# Altium PCB Insole_ver2.PcbDoc (part 1 of 3)
Units mil, origin at the board's own origin, x right, y up, seen from the top; angles counter-clockwise.
Board outline 8634.93 x 10258.5 mil, 2 copper layers (Top Layer, Bottom Layer); 507 components, 50 nets, 1329 pads, 253 vias.
Unrouted connection lines stored in the file: 728.
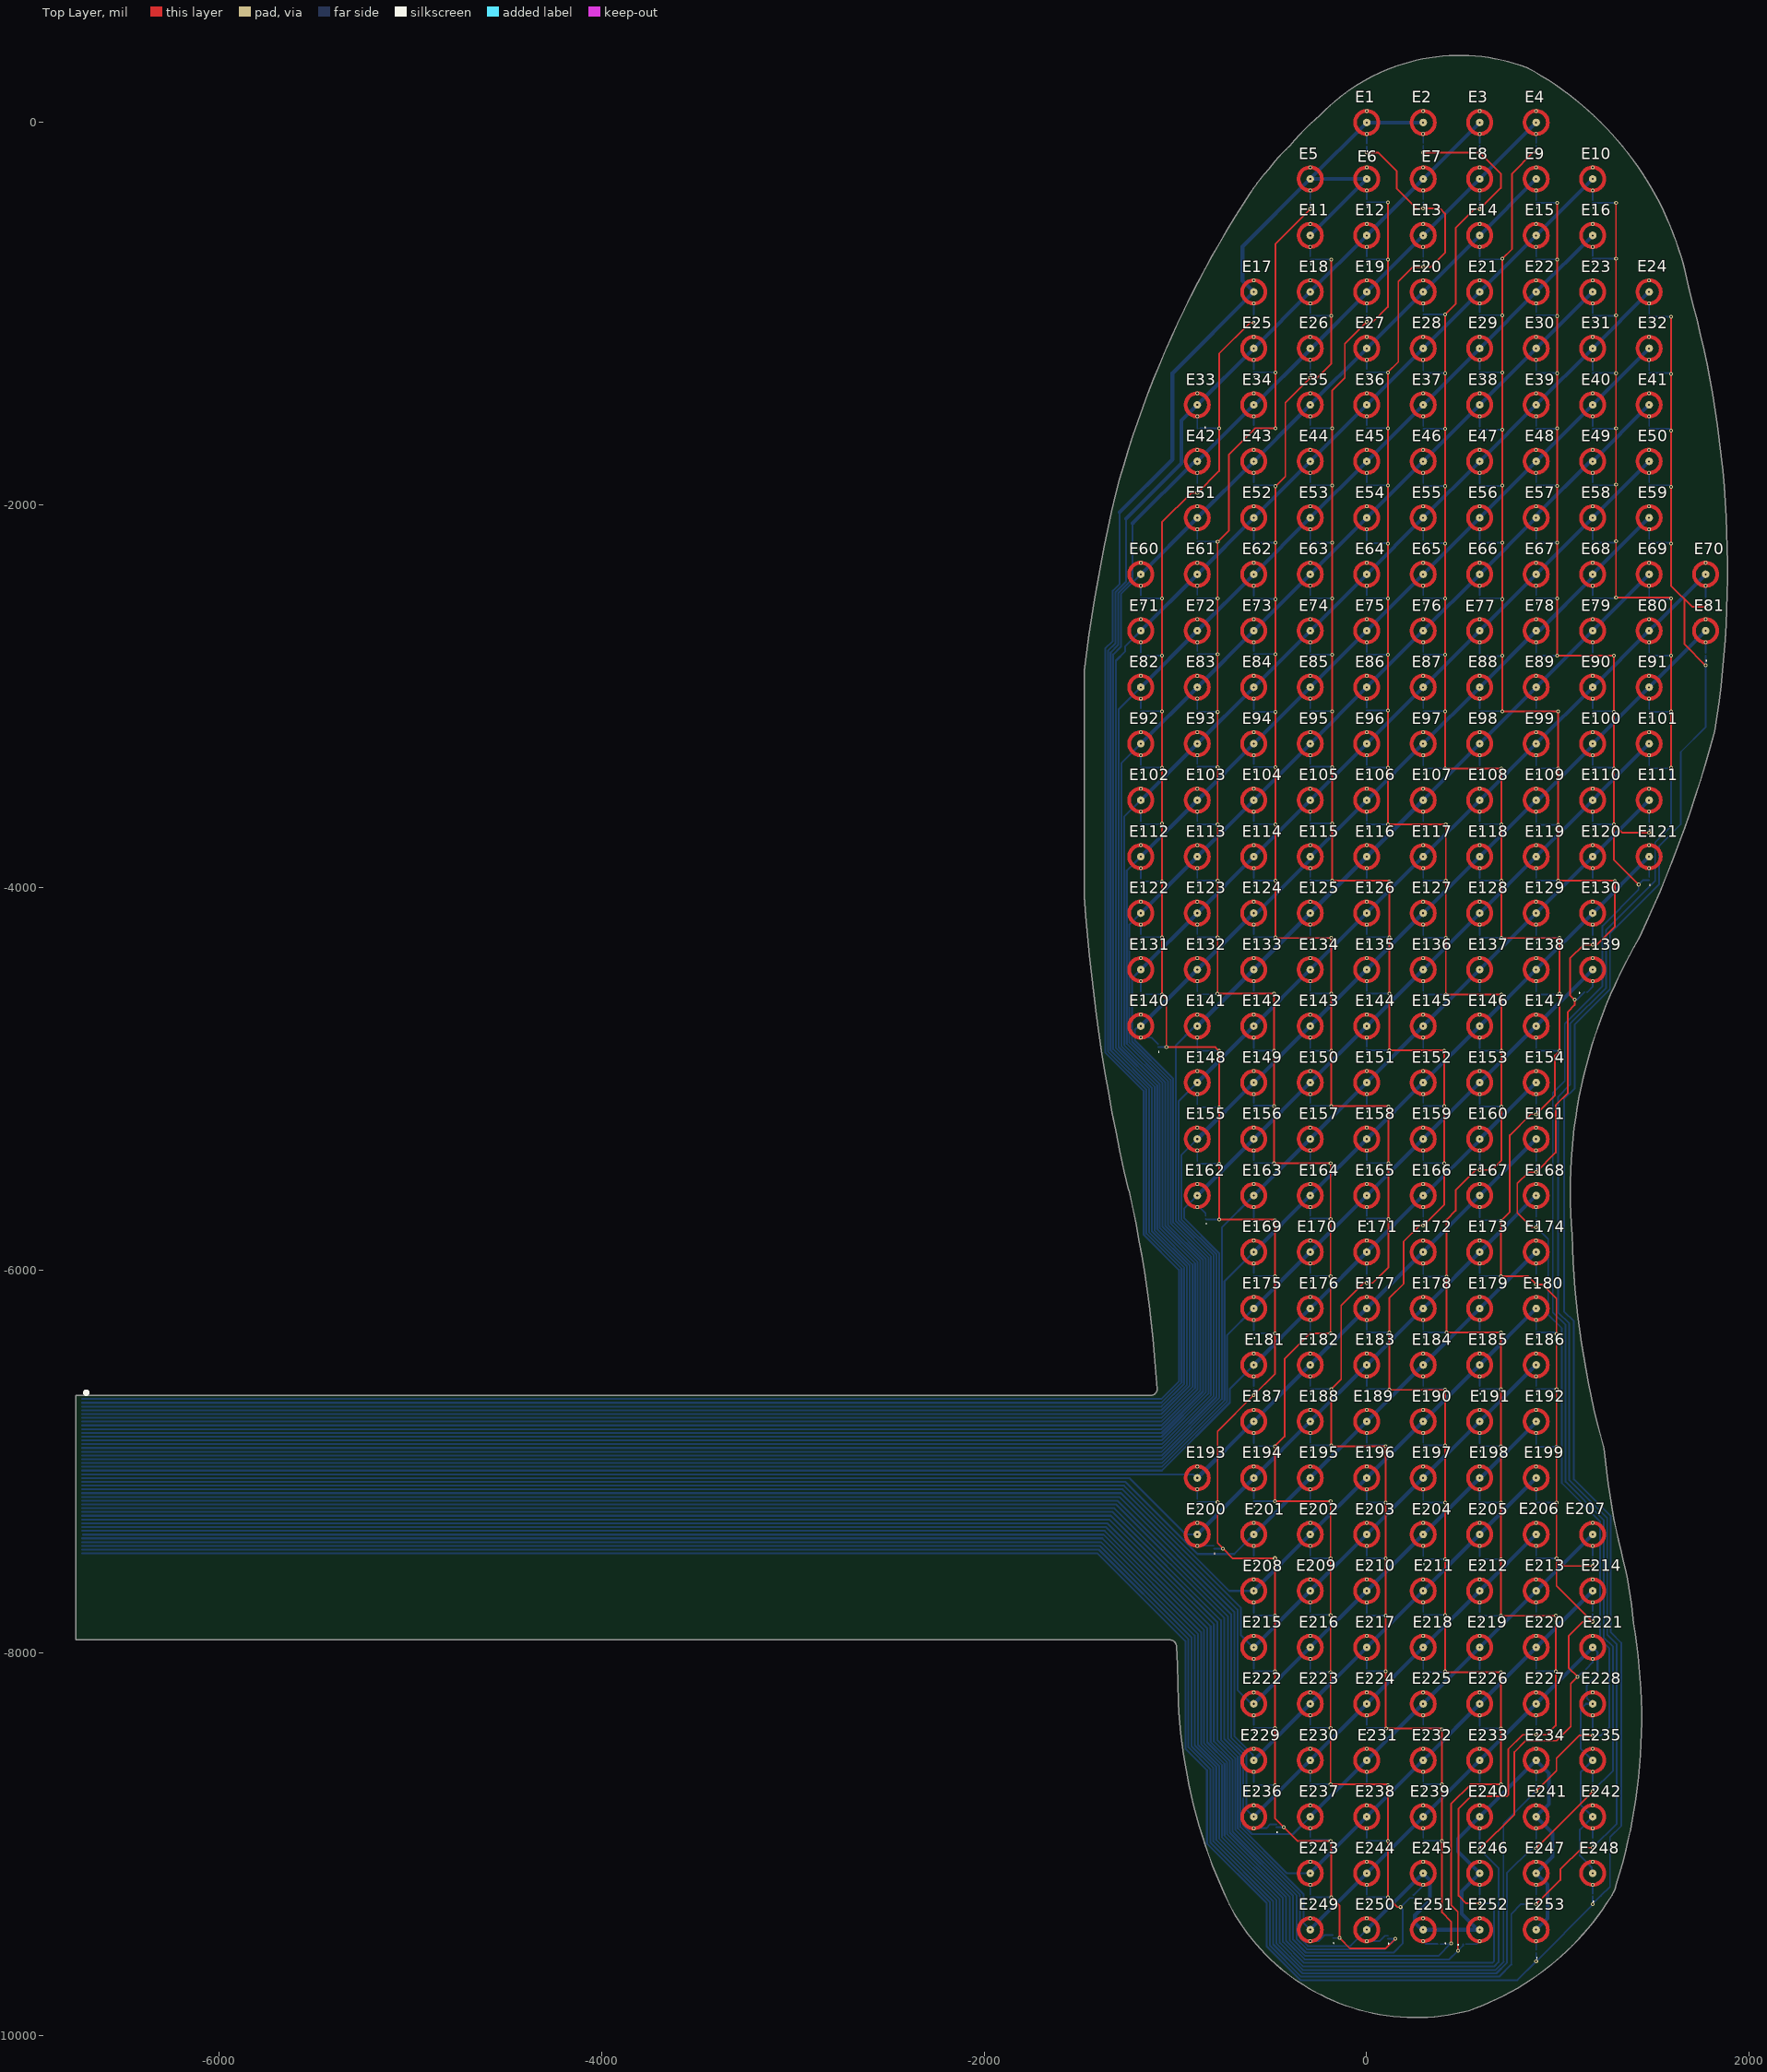
[diagram p0: Top Layer view]
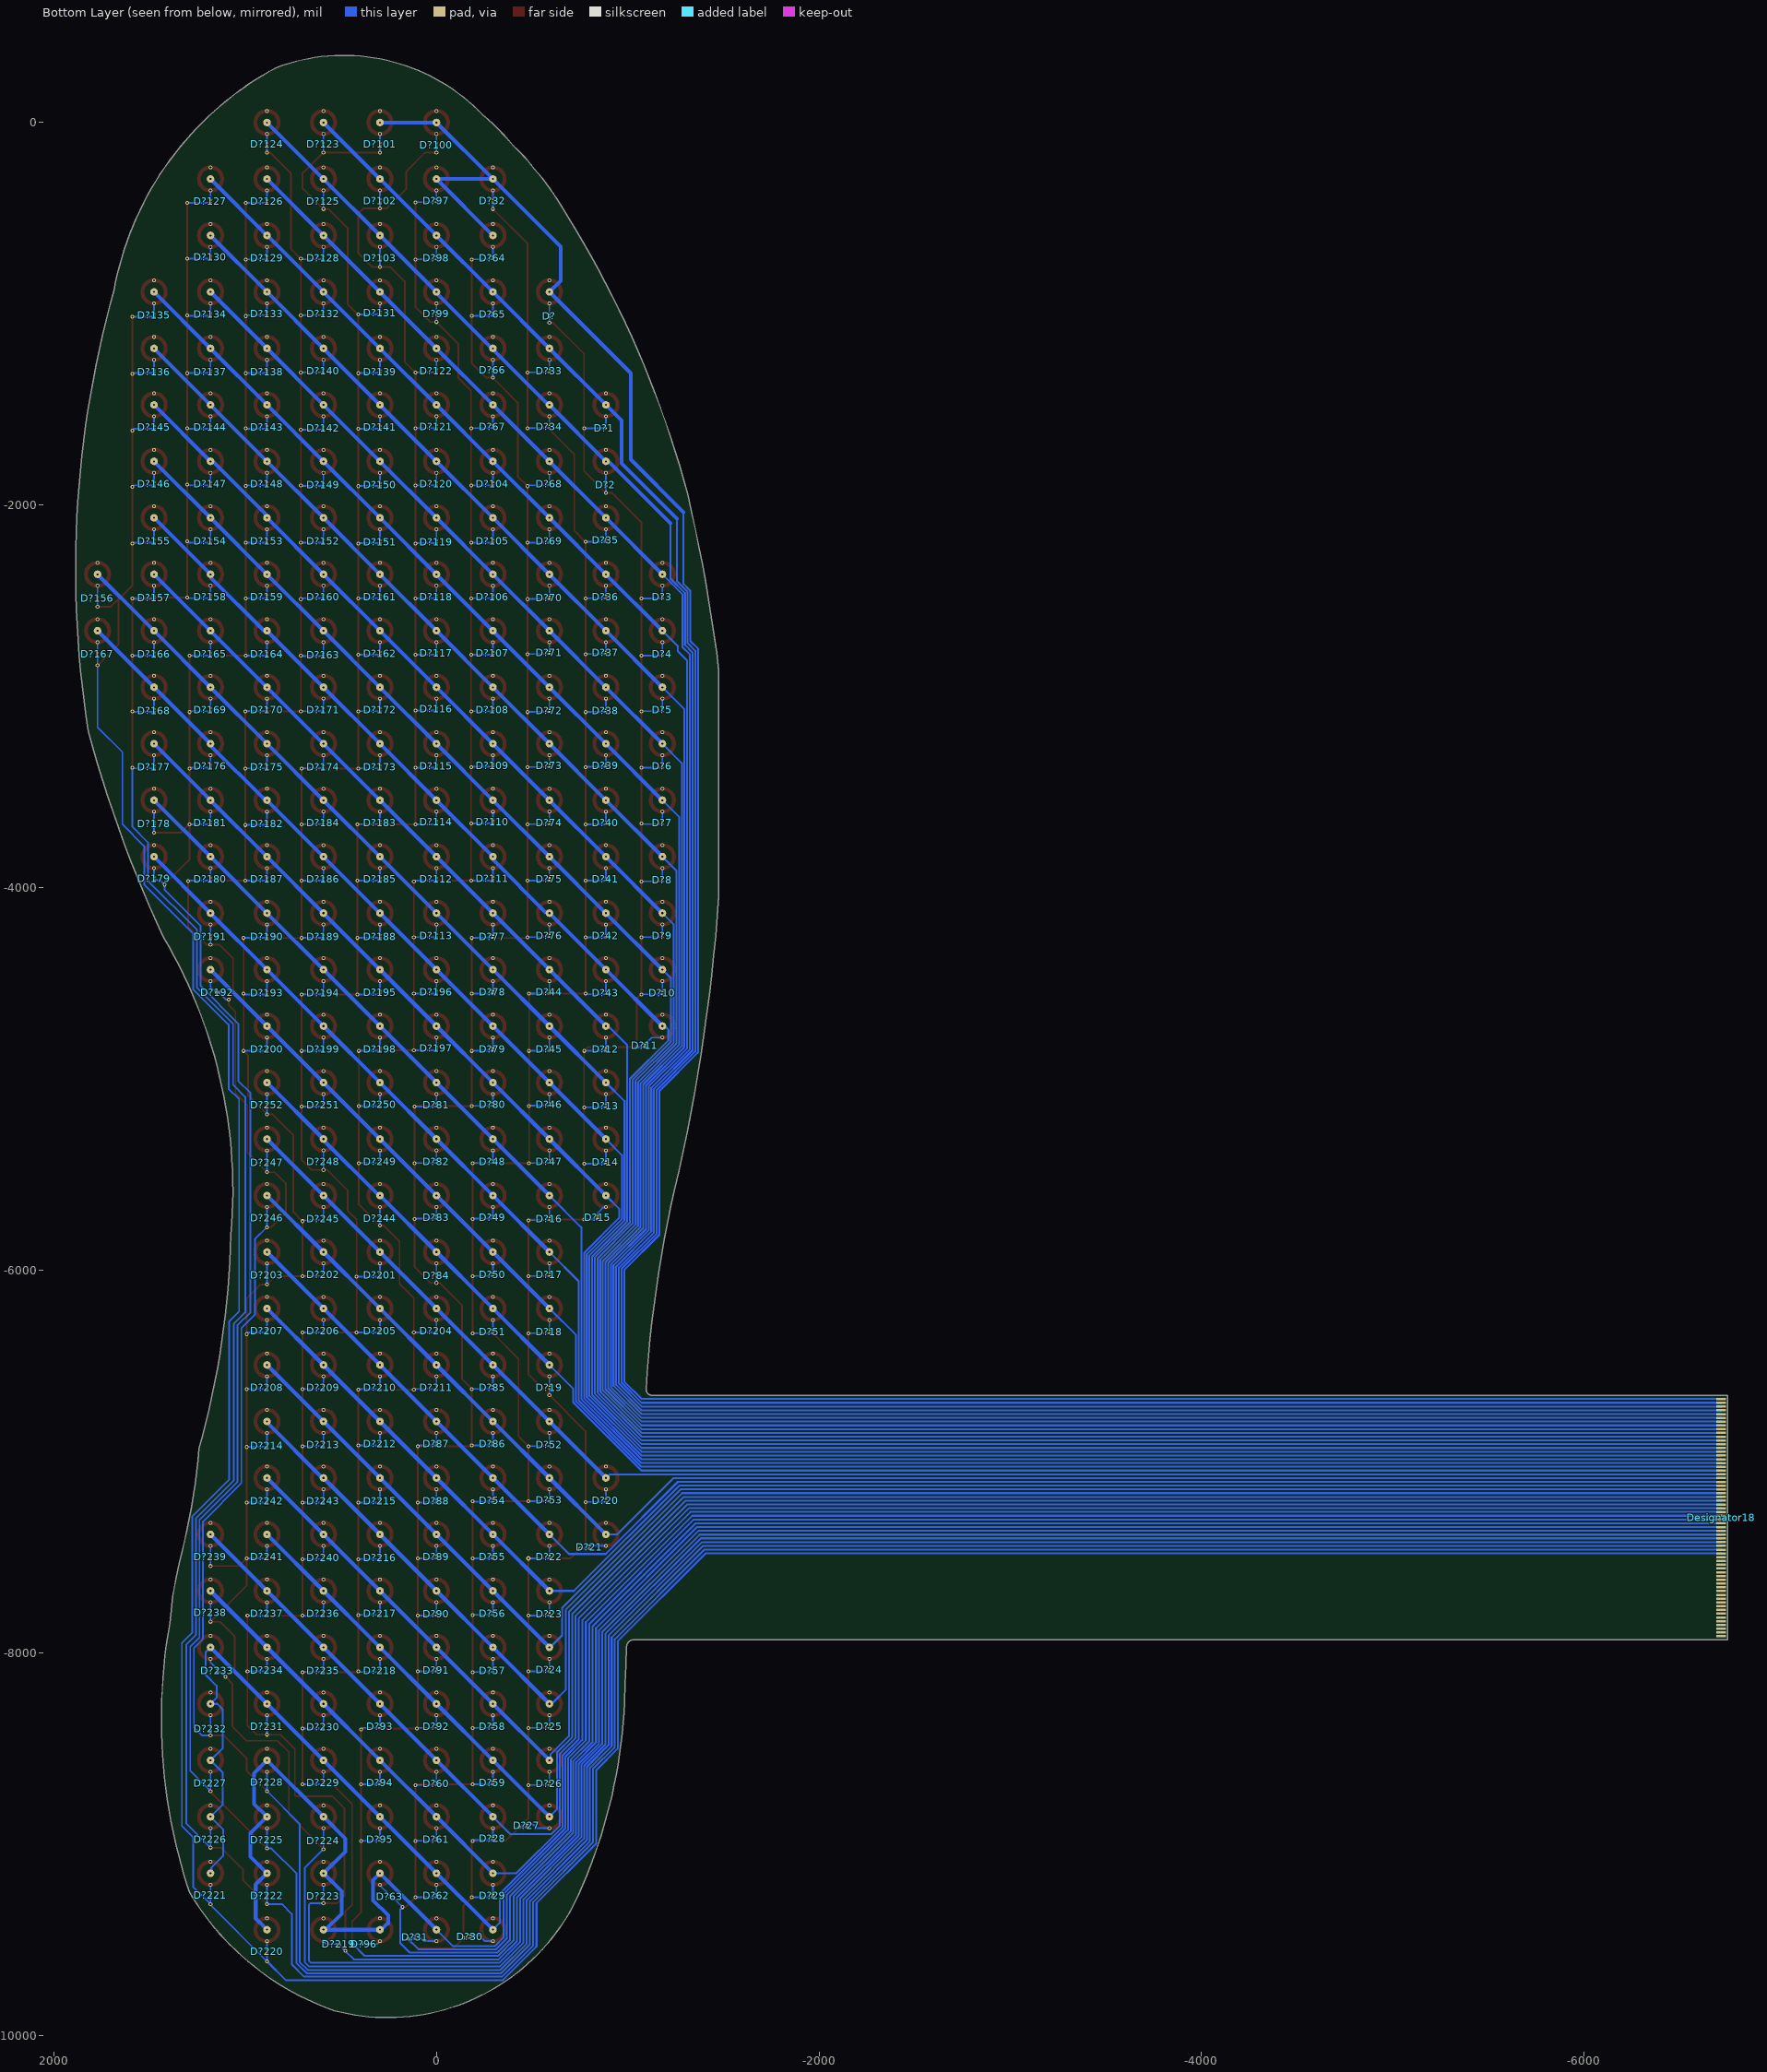
[diagram p1: Bottom Layer view, seen from below]

## Layer stack, top to bottom
Top Solder: solder mask 0.4, Solder Resist, Dk 3.5
Top Layer: signal copper 1.4
Dielectric 1: dielectric 12.6, FR-4, Dk 4.8
Bottom Layer: signal copper 1.4
Bottom Solder: solder mask 0.4, Solder Resist, Dk 3.5

## Board outline
-6749.02,-7933.46 -6749.02,-7924.29 -6749.02,-6664.33 -6749.02,-6654.33 -1125,-6654.33 ccw(c-1126.66,-6623.66) -1096,-6622 -1095.9,-6621.99 ccw(c-7729.36,-7029.93) -1243,-5582.02 -1244.89,-5582.15 cw(c8166.3,-3378.54) -1476.36,-4045.95 -1476.36,-2864.85 cw(c7311.45,-3944.72) -1313.08,-1942.41 cw(c3918.94,-3341.98) -645.19,-426.24 cw(c298.66,-974.06) -512.56,-244.08 cw(c175.46,-757.6) -401.59,-121.92 cw(c543.88,-896.94) -242,39.53 cw(c485.96,-656.21) 835.98,287.96 cw(c52.22,-1175.58) 1685.24,-876.42 cw(c-3527.57,-2337.08) 1819.32,-3184.24 cw(c-4531.03,-1475.13) 1426.2,-4260.7 ccw(c3666.75,-5584.92) 1074.31,-5814.86 ccw(c5587.75,-5713.61) 1240.88,-6932.71 ccw(c4856.2,-6611.73) 1331.49,-7477.73 cw(c-856.54,-8039.02) 1394.08,-7846.04 cw(c-1473.16,-8345.15) 1304.04,-9215.4 1303.8,-9215.35 cw(c1118,-9169.77) 1274.97,-9279.14 cw(c65,-8526.05) 531.52,-9872.72 cw(c255.92,-8809.73) -718.36,-9316.36 cw(c1754.38,-8132.87) -984.15,-8257.65 ccw(c-12790.3,-8516.48) -994.08,-7967.56 ccw(c-1029.84,-7969.22) -1031.5,-7933.46

## Design rules (kind name [scope] priority, off if disabled: settings)
Clearance [All] p1: gap=10 ignorepadtopadclearanceinfootprint=TRUE except(0: Arc-SMDPad Arc-THPad Arc-Hole Track-Hole SMDPad-Hole THPad-Hole Via-Hole Fill-Hole Poly-Hole Region-Hole Text-Hole; 4: Arc-Arc Arc-Track Track-Track Track-THPad; 5: SMDPad-SMDPad SMDPad-THPad SMDPad-Fill SMDPad-Poly SMDPad-Region THPad-Fill THPad-Poly THPad-Region; 5.91: Track-SMDPad; 7.87: Arc-Fill Arc-Poly Arc-Region Track-Fill Track-Poly Track-Region)
DiffPairsRouting [All] p1: maxlimit=10 minlimit=10 mostfreqgap=10 toplayer_minwidth=15 toplayer_maxwidth=15 toplayer_prefwidth=15 bottomlayer_minwidth=15 bottomlayer_maxwidth=15 bottomlayer_prefwidth=15 substack1={6D9DD50E-99D7-4FCE-B177-F3C0DD92A880} toplayer_{6d9dd50e-99d7-4fce-b177-f3c0dd92a880}_minwidth=15 toplayer_{6d9dd50e-99d7-4fce-b177-f3c0dd92a880}_maxwidth=15 toplayer_{6d9dd50e-99d7-4fce-b177-f3c0dd92a880}_prefwidth=15 bottomlayer_{6d9dd50e-99d7-4fce-b177-f3c0dd92a880}_minwidth=15 bottomlayer_{6d9dd50e-99d7-4fce-b177-f3c0dd92a880}_maxwidth=15 bottomlayer_{6d9dd50e-99d7-4fce-b177-f3c0dd92a880}_prefwidth=15 maxuncoupledlength=500
PolygonConnect [All] p1: connectstyle=Relief reliefconductorwidth=10 reliefentries=4 polygonreliefangle="90 Angle" airgapwidth=10
RoutingVias [All] p1: holewidth=28 width=50 viastyle="Through Hole" minholewidth=28 minwidth=50 maxholewidth=28 maxwidth=50
ShortCircuit [All] p1: allowed=TRUE
SolderMaskExpansion [All] p1: expansion=4 istentingtop=FALSE
UnRoutedNet [All] p1 off:
Width [All] p1: maxlimit=39.37 minlimit=9 preferedwidth=10 substack1={6D9DD50E-99D7-4FCE-B177-F3C0DD92A880} toplayer_{6d9dd50e-99d7-4fce-b177-f3c0dd92a880}_minwidth=10 toplayer_{6d9dd50e-99d7-4fce-b177-f3c0dd92a880}_maxwidth=10 bottomlayer_{6d9dd50e-99d7-4fce-b177-f3c0dd92a880}_minwidth=10 bottomlayer_{6d9dd50e-99d7-4fce-b177-f3c0dd92a880}_maxwidth=10 minimp=50.000000 maximp=50.000000 favimp=50.000000
27 further rules are at their usual default settings.

## Classes and differential pairs
component class Insole_ver2: D1 E1 E2 E3 E4 E5 E6 E7 E8 E9 E10 E11 E12 E13 E14 E15 E16 E17 E18 E19 E20 E21 E22 E23 E24 E25 E26 E27 E28 E29 E30 E31 E32 E33 E34 E35 E36 E37 E38 E39 E40 E41 E42 E43 E44 E45 E46 E47 E48 E49 E50 E51 E52 E53 E54 E55 E56 E57 E58 E59 E60 E61 E62 E63 E64 E65 E66 E67 E68 E69 E70 E71 E72 E73 E74 E75 E76 E77 E78 E79 E80 E81 E82 E83 E84 E85 E86 E87 E88 E89 E90 E91 E92 E93 E94 E95 E96 E97 E98 E99 E100 E101 E102 E103 E104 E105 E106 E107 E108 E109 E110 E111 E112 E113 E114 E115 E116 E117 E118 E119 E120 E121 E122 E123 E124 E125 E126 E127 E128 E129 E130 E131 E132 E133 E134 E135 E136 E137 E138 E139 E140 E141 E142 E143 E144 E145 E146 E147 E148 E149 E150 E151 E152 E153 E154 E155 E156 E157 E158 E159 E160 E161 E163 E164 E165 E166 E167 E168 E170 E172 E174 E176 E178 E180 E182 E184 E186 E246 E248 E250

## Components (designator, comment, footprint, x,y, rotation, side; value= is the part's Value field where it differs from the comment)
D? "RB520ZS-30T2R" RB520ZS30T2R -590.55,-1011.42 r180 top
D?1 "RB520ZS-30T2R" RB520ZS30T2R -877.56,-1598.43 r270 top (schematic designator D?)
D?2 "RB520ZS-30T2R" RB520ZS30T2R -885.83,-1893.31 r180 top (schematic designator D?)
D?3 "RB520ZS-30T2R" RB520ZS30T2R -1181.1,-2480.71 r180 top (schematic designator D?)
D?4 "RB520ZS-30T2R" RB520ZS30T2R -1181.1,-2779.13 r180 top (schematic designator D?)
D?5 "RB520ZS-30T2R" RB520ZS30T2R -1181.1,-3070.47 r180 top (schematic designator D?)
D?6 "RB520ZS-30T2R" RB520ZS30T2R -1181.1,-3365.75 r180 top (schematic designator D?)
D?7 "RB520ZS-30T2R" RB520ZS30T2R -1181.1,-3661.02 r180 top (schematic designator D?)
D?8 "RB520ZS-30T2R" RB520ZS30T2R -1181.1,-3960.24 r180 top (schematic designator D?)
D?9 "RB520ZS-30T2R" RB520ZS30T2R -1181.1,-4251.57 r180 top (schematic designator D?)
D?10 "RB520ZS-30T2R" RB520ZS30T2R -1181.1,-4550.79 r180 top (schematic designator D?)
D?11 "RB520ZS-30T2R" RB520ZS30T2R -1090.55,-4826.38 r180 top (schematic designator D?)
D?12 "RB520ZS-30T2R" RB520ZS30T2R -885.83,-4846.06 r180 top (schematic designator D?)
D?13 "RB520ZS-30T2R" RB520ZS30T2R -885.83,-5141.34 r180 top (schematic designator D?)
D?14 "RB520ZS-30T2R" RB520ZS30T2R -885.83,-5436.61 r180 top (schematic designator D?)
D?15 "RB520ZS-30T2R" RB520ZS30T2R -842.52,-5724.02 r180 top (schematic designator D?)
D?16 "RB520ZS-30T2R" RB520ZS30T2R -590.55,-5731.89 r180 top (schematic designator D?)
D?17 "RB520ZS-30T2R" RB520ZS30T2R -590.55,-6023.23 r180 top (schematic designator D?)
D?18 "RB520ZS-30T2R" RB520ZS30T2R -590.55,-6322.44 r180 top (schematic designator D?)
D?19 "RB520ZS-30T2R" RB520ZS30T2R -590.55,-6613.78 r180 top (schematic designator D?)
D?20 "RB520ZS-30T2R" RB520ZS30T2R -885.83,-7204.33 r180 top (schematic designator D?)
D?21 "RB520ZS-30T2R" RB520ZS30T2R -799.21,-7448.43 r180 top (schematic designator D?)
D?22 "RB520ZS-30T2R" RB520ZS30T2R -590.55,-7499.61 r180 top (schematic designator D?)
D?23 "RB520ZS-30T2R" RB520ZS30T2R -590.55,-7798.82 r180 top (schematic designator D?)
D?24 "RB520ZS-30T2R" RB520ZS30T2R -590.55,-8090.16 r180 top (schematic designator D?)
D?25 "RB520ZS-30T2R" RB520ZS30T2R -590.55,-8385.43 r180 top (schematic designator D?)
D?26 "RB520ZS-30T2R" RB520ZS30T2R -590.55,-8684.65 r180 top (schematic designator D?)
D?27 "RB520ZS-30T2R" RB520ZS30T2R -472.44,-8905.12 r180 top (schematic designator D?)
D?28 "RB520ZS-30T2R" RB520ZS30T2R -295.28,-8972.05 r180 top (schematic designator D?)
D?29 "RB520ZS-30T2R" RB520ZS30T2R -295.28,-9271.26 r180 top (schematic designator D?)
D?30 "RB520ZS-30T2R" RB520ZS30T2R -177.17,-9484.65 r180 top (schematic designator D?)
D?31 "RB520ZS-30T2R" RB520ZS30T2R 110.24,-9487.8 r180 top (schematic designator D?)
D?32 "RB520ZS-30T2R" RB520ZS30T2R -295.28,-409.84 r180 top (schematic designator D?)
D?33 "RB520ZS-30T2R" RB520ZS30T2R -590.55,-1298.82 r180 top (schematic designator D?)
D?34 "RB520ZS-30T2R" RB520ZS30T2R -590.55,-1590.16 r180 top (schematic designator D?)
D?35 "RB520ZS-30T2R" RB520ZS30T2R -885.83,-2184.65 r180 top (schematic designator D?)
D?36 "RB520ZS-30T2R" RB520ZS30T2R -885.83,-2479.92 r180 top (schematic designator D?)
D?37 "RB520ZS-30T2R" RB520ZS30T2R -885.83,-2771.26 r180 top (schematic designator D?)
D?38 "RB520ZS-30T2R" RB520ZS30T2R -885.83,-3074.41 r180 top (schematic designator D?)
D?39 "RB520ZS-30T2R" RB520ZS30T2R -885.83,-3361.81 r180 top (schematic designator D?)
D?40 "RB520ZS-30T2R" RB520ZS30T2R -885.83,-3661.81 r180 top (schematic designator D?)
D?41 "RB520ZS-30T2R" RB520ZS30T2R -885.83,-3956.3 r180 top (schematic designator D?)
D?42 "RB520ZS-30T2R" RB520ZS30T2R -885.83,-4252.36 r180 top (schematic designator D?)
D?43 "RB520ZS-30T2R" RB520ZS30T2R -885.83,-4550.79 r180 top (schematic designator D?)
D?44 "RB520ZS-30T2R" RB520ZS30T2R -590.55,-4546.85 r180 top (schematic designator D?)
D?45 "RB520ZS-30T2R" RB520ZS30T2R -590.55,-4846.06 r180 top (schematic designator D?)
D?46 "RB520ZS-30T2R" RB520ZS30T2R -590.55,-5133.46 r180 top (schematic designator D?)
D?47 "RB520ZS-30T2R" RB520ZS30T2R -590.55,-5432.68 r180 top (schematic designator D?)
D?48 "RB520ZS-30T2R" RB520ZS30T2R -295.28,-5432.68 r180 top (schematic designator D?)
D?49 "RB520ZS-30T2R" RB520ZS30T2R -295.28,-5724.02 r180 top (schematic designator D?)
D?50 "RB520ZS-30T2R" RB520ZS30T2R -295.28,-6023.23 r180 top (schematic designator D?)
D?51 "RB520ZS-30T2R" RB520ZS30T2R -295.28,-6322.44 r180 top (schematic designator D?)
D?52 "RB520ZS-30T2R" RB520ZS30T2R -590.55,-6912.99 r180 top (schematic designator D?)
D?53 "RB520ZS-30T2R" RB520ZS30T2R -590.55,-7201.18 r180 top (schematic designator D?)
D?54 "RB520ZS-30T2R" RB520ZS30T2R -295.28,-7204.33 r180 top (schematic designator D?)
D?55 "RB520ZS-30T2R" RB520ZS30T2R -295.28,-7499.61 r180 top (schematic designator D?)
D?56 "RB520ZS-30T2R" RB520ZS30T2R -295.28,-7794.88 r180 top (schematic designator D?)
D?57 "RB520ZS-30T2R" RB520ZS30T2R -295.28,-8094.09 r180 top (schematic designator D?)
D?58 "RB520ZS-30T2R" RB520ZS30T2R -295.28,-8385.43 r180 top (schematic designator D?)
D?59 "RB520ZS-30T2R" RB520ZS30T2R -295.28,-8680.71 r180 top (schematic designator D?)
D?60 "RB520ZS-30T2R" RB520ZS30T2R 0,-8684.65 r180 top (schematic designator D?)
D?61 "RB520ZS-30T2R" RB520ZS30T2R 0,-8975.98 r180 top (schematic designator D?)
D?62 "RB520ZS-30T2R" RB520ZS30T2R 0,-9271.26 r180 top (schematic designator D?)
D?63 "RB520ZS-30T2R" RB520ZS30T2R 244.09,-9275.2 r180 top (schematic designator D?)
D?64 "RB520ZS-30T2R" RB520ZS30T2R -295.28,-708.27 r180 top (schematic designator D?)
D?65 "RB520ZS-30T2R" RB520ZS30T2R -295.28,-1003.54 r180 top (schematic designator D?)
D?66 "RB520ZS-30T2R" RB520ZS30T2R -295.28,-1294.88 r180 top (schematic designator D?)
D?67 "RB520ZS-30T2R" RB520ZS30T2R -295.28,-1590.16 r180 top (schematic designator D?)
D?68 "RB520ZS-30T2R" RB520ZS30T2R -590.55,-1889.37 r180 top (schematic designator D?)
D?69 "RB520ZS-30T2R" RB520ZS30T2R -590.55,-2188.58 r180 top (schematic designator D?)
D?70 "RB520ZS-30T2R" RB520ZS30T2R -590.55,-2483.86 r180 top (schematic designator D?)
D?71 "RB520ZS-30T2R" RB520ZS30T2R -590.55,-2771.26 r180 top (schematic designator D?)
D?72 "RB520ZS-30T2R" RB520ZS30T2R -590.55,-3074.41 r180 top (schematic designator D?)
D?73 "RB520ZS-30T2R" RB520ZS30T2R -590.55,-3362.2 r180 top (schematic designator D?)
D?74 "RB520ZS-30T2R" RB520ZS30T2R -590.55,-3661.02 r180 top (schematic designator D?)
D?75 "RB520ZS-30T2R" RB520ZS30T2R -590.55,-3956.3 r180 top (schematic designator D?)
D?76 "RB520ZS-30T2R" RB520ZS30T2R -590.55,-4251.57 r180 top (schematic designator D?)
D?77 "RB520ZS-30T2R" RB520ZS30T2R -295.28,-4255.51 r180 top (schematic designator D?)
D?78 "RB520ZS-30T2R" RB520ZS30T2R -295.28,-4546.85 r180 top (schematic designator D?)
D?79 "RB520ZS-30T2R" RB520ZS30T2R -295.28,-4846.06 r180 top (schematic designator D?)
D?80 "RB520ZS-30T2R" RB520ZS30T2R -295.28,-5133.86 r180 top (schematic designator D?)
D?81 "RB520ZS-30T2R" RB520ZS30T2R 0,-5137.4 r180 top (schematic designator D?)
D?82 "RB520ZS-30T2R" RB520ZS30T2R 0,-5432.68 r180 top (schematic designator D?)
D?83 "RB520ZS-30T2R" RB520ZS30T2R 0,-5724.02 r180 top (schematic designator D?)
D?84 "RB520ZS-30T2R" RB520ZS30T2R 0,-6027.56 r180 top (schematic designator D?)
D?85 "RB520ZS-30T2R" RB520ZS30T2R -295.28,-6613.78 r180 top (schematic designator D?)
D?86 "RB520ZS-30T2R" RB520ZS30T2R -295.28,-6909.06 r180 top (schematic designator D?)
D?87 "RB520ZS-30T2R" RB520ZS30T2R 0,-6909.06 r180 top (schematic designator D?)
D?88 "RB520ZS-30T2R" RB520ZS30T2R 0,-7208.27 r180 top (schematic designator D?)
D?89 "RB520ZS-30T2R" RB520ZS30T2R 0,-7499.61 r180 top (schematic designator D?)
D?90 "RB520ZS-30T2R" RB520ZS30T2R 0,-7798.82 r180 top (schematic designator D?)
D?91 "RB520ZS-30T2R" RB520ZS30T2R 0,-8090.94 r180 top (schematic designator D?)
D?92 "RB520ZS-30T2R" RB520ZS30T2R 0,-8385.43 r180 top (schematic designator D?)
D?93 "RB520ZS-30T2R" RB520ZS30T2R 295.28,-8385.43 r180 top (schematic designator D?)
D?94 "RB520ZS-30T2R" RB520ZS30T2R 295.28,-8680.71 r180 top (schematic designator D?)
D?95 "RB520ZS-30T2R" RB520ZS30T2R 295.28,-8975.98 r180 top (schematic designator D?)
D?96 "RB520ZS-30T2R" RB520ZS30T2R 378.35,-9523.62 r270 top (schematic designator D?)
D?97 "RB520ZS-30T2R" RB520ZS30T2R 0,-409.06 r180 top (schematic designator D?)
D?98 "RB520ZS-30T2R" RB520ZS30T2R 0,-708.27 r180 top (schematic designator D?)
D?99 "RB520ZS-30T2R" RB520ZS30T2R 0,-999.61 r180 top (schematic designator D?)
D?100 "RB520ZS-30T2R" RB520ZS30T2R 0,-117.72 r180 top (schematic designator D?)
D?101 "RB520ZS-30T2R" RB520ZS30T2R 295.28,-113.78 r180 top (schematic designator D?)
D?102 "RB520ZS-30T2R" RB520ZS30T2R 295.28,-409.06 r180 top (schematic designator D?)
D?103 "RB520ZS-30T2R" RB520ZS30T2R 295.28,-709.06 r180 top (schematic designator D?)
D?104 "RB520ZS-30T2R" RB520ZS30T2R -295.28,-1889.37 r180 top (schematic designator D?)
D?105 "RB520ZS-30T2R" RB520ZS30T2R -295.28,-2188.58 r180 top (schematic designator D?)
D?106 "RB520ZS-30T2R" RB520ZS30T2R -295.28,-2479.92 r180 top (schematic designator D?)
D?107 "RB520ZS-30T2R" RB520ZS30T2R -295.28,-2775.2 r180 top (schematic designator D?)
D?108 "RB520ZS-30T2R" RB520ZS30T2R -295.28,-3070.47 r180 top (schematic designator D?)
D?109 "RB520ZS-30T2R" RB520ZS30T2R -295.28,-3361.81 r180 top (schematic designator D?)
D?110 "RB520ZS-30T2R" RB520ZS30T2R -295.28,-3657.09 r180 top (schematic designator D?)
D?111 "RB520ZS-30T2R" RB520ZS30T2R -295.28,-3952.36 r180 top (schematic designator D?)
D?112 "RB520ZS-30T2R" RB520ZS30T2R 0,-3956.3 r180 top (schematic designator D?)
D?113 "RB520ZS-30T2R" RB520ZS30T2R 0,-4251.57 r180 top (schematic designator D?)
D?114 "RB520ZS-30T2R" RB520ZS30T2R 0,-3657.09 r180 top (schematic designator D?)
D?115 "RB520ZS-30T2R" RB520ZS30T2R 0,-3365.75 r180 top (schematic designator D?)
D?116 "RB520ZS-30T2R" RB520ZS30T2R 0,-3066.54 r180 top (schematic designator D?)
D?117 "RB520ZS-30T2R" RB520ZS30T2R 0,-2775.2 r180 top (schematic designator D?)
D?118 "RB520ZS-30T2R" RB520ZS30T2R 0,-2479.92 r180 top (schematic designator D?)
D?119 "RB520ZS-30T2R" RB520ZS30T2R 0,-2192.52 r180 top (schematic designator D?)
D?120 "RB520ZS-30T2R" RB520ZS30T2R 0,-1889.37 r180 top (schematic designator D?)
D?121 "RB520ZS-30T2R" RB520ZS30T2R 0,-1590.16 r180 top (schematic designator D?)
D?122 "RB520ZS-30T2R" RB520ZS30T2R 0,-1298.82 r180 top (schematic designator D?)
D?123 "RB520ZS-30T2R" RB520ZS30T2R 590.55,-113.78 r180 top (schematic designator D?)
D?124 "RB520ZS-30T2R" RB520ZS30T2R 885.83,-113.78 r180 top (schematic designator D?)
D?125 "RB520ZS-30T2R" RB520ZS30T2R 590.55,-412.99 r180 top (schematic designator D?)
D?126 "RB520ZS-30T2R" RB520ZS30T2R 885.83,-412.99 r180 top (schematic designator D?)
D?127 "RB520ZS-30T2R" RB520ZS30T2R 1181.1,-412.99 r180 top (schematic designator D?)
D?128 "RB520ZS-30T2R" RB520ZS30T2R 590.55,-708.27 r180 top (schematic designator D?)
D?129 "RB520ZS-30T2R" RB520ZS30T2R 885.83,-708.27 r180 top (schematic designator D?)
D?130 "RB520ZS-30T2R" RB520ZS30T2R 1181.1,-704.33 r180 top (schematic designator D?)
D?131 "RB520ZS-30T2R" RB520ZS30T2R 295.28,-995.67 r180 top (schematic designator D?)
D?132 "RB520ZS-30T2R" RB520ZS30T2R 590.55,-999.61 r180 top (schematic designator D?)
D?133 "RB520ZS-30T2R" RB520ZS30T2R 885.83,-999.61 r180 top (schematic designator D?)
D?134 "RB520ZS-30T2R" RB520ZS30T2R 1181.1,-1003.54 r180 top (schematic designator D?)
D?135 "RB520ZS-30T2R" RB520ZS30T2R 1476.38,-1007.48 r180 top (schematic designator D?)
D?136 "RB520ZS-30T2R" RB520ZS30T2R 1476.38,-1302.76 r180 top (schematic designator D?)
D?137 "RB520ZS-30T2R" RB520ZS30T2R 1181.1,-1302.76 r180 top (schematic designator D?)
D?138 "RB520ZS-30T2R" RB520ZS30T2R 885.83,-1302.76 r180 top (schematic designator D?)
D?139 "RB520ZS-30T2R" RB520ZS30T2R 295.28,-1302.76 r180 top (schematic designator D?)
D?140 "RB520ZS-30T2R" RB520ZS30T2R 590.55,-1298.82 r180 top (schematic designator D?)
D?141 "RB520ZS-30T2R" RB520ZS30T2R 295.28,-1594.09 r180 top (schematic designator D?)
D?142 "RB520ZS-30T2R" RB520ZS30T2R 590.55,-1598.03 r180 top (schematic designator D?)
D?143 "RB520ZS-30T2R" RB520ZS30T2R 885.83,-1594.09 r180 top (schematic designator D?)
D?144 "RB520ZS-30T2R" RB520ZS30T2R 1181.1,-1594.09 r180 top (schematic designator D?)
D?145 "RB520ZS-30T2R" RB520ZS30T2R 1476.38,-1594.09 r180 top (schematic designator D?)
D?146 "RB520ZS-30T2R" RB520ZS30T2R 1476.38,-1889.37 r180 top (schematic designator D?)
D?147 "RB520ZS-30T2R" RB520ZS30T2R 1181.1,-1889.37 r180 top (schematic designator D?)
D?148 "RB520ZS-30T2R" RB520ZS30T2R 885.83,-1889.37 r180 top (schematic designator D?)
D?149 "RB520ZS-30T2R" RB520ZS30T2R 590.55,-1893.31 r180 top (schematic designator D?)
D?150 "RB520ZS-30T2R" RB520ZS30T2R 295.28,-1893.31 r180 top (schematic designator D?)
D?151 "RB520ZS-30T2R" RB520ZS30T2R 295.28,-2192.52 r180 top (schematic designator D?)
D?152 "RB520ZS-30T2R" RB520ZS30T2R 590.55,-2188.58 r180 top (schematic designator D?)
D?153 "RB520ZS-30T2R" RB520ZS30T2R 885.83,-2188.58 r180 top (schematic designator D?)
D?154 "RB520ZS-30T2R" RB520ZS30T2R 1181.1,-2188.58 r180 top (schematic designator D?)
D?155 "RB520ZS-30T2R" RB520ZS30T2R 1476.38,-2188.58 r180 top (schematic designator D?)
D?156 "RB520ZS-30T2R" RB520ZS30T2R 1771.65,-2488.19 r180 top (schematic designator D?)
D?157 "RB520ZS-30T2R" RB520ZS30T2R 1476.38,-2483.86 r180 top (schematic designator D?)
D?158 "RB520ZS-30T2R" RB520ZS30T2R 1181.1,-2479.92 r180 top (schematic designator D?)
D?159 "RB520ZS-30T2R" RB520ZS30T2R 885.83,-2479.92 r180 top (schematic designator D?)
D?160 "RB520ZS-30T2R" RB520ZS30T2R 590.55,-2479.92 r180 top (schematic designator D?)
D?161 "RB520ZS-30T2R" RB520ZS30T2R 295.28,-2479.92 r180 top (schematic designator D?)
D?162 "RB520ZS-30T2R" RB520ZS30T2R 295.28,-2775.59 r180 top (schematic designator D?)
D?163 "RB520ZS-30T2R" RB520ZS30T2R 590.55,-2783.07 r180 top (schematic designator D?)
D?164 "RB520ZS-30T2R" RB520ZS30T2R 885.83,-2779.13 r180 top (schematic designator D?)
D?165 "RB520ZS-30T2R" RB520ZS30T2R 1181.1,-2779.13 r180 top (schematic designator D?)
D?166 "RB520ZS-30T2R" RB520ZS30T2R 1476.38,-2779.13 r180 top (schematic designator D?)
D?167 "RB520ZS-30T2R" RB520ZS30T2R 1771.65,-2779.92 r180 top (schematic designator D?)
D?168 "RB520ZS-30T2R" RB520ZS30T2R 1476.38,-3074.41 r180 top (schematic designator D?)
D?169 "RB520ZS-30T2R" RB520ZS30T2R 1181.1,-3070.47 r180 top (schematic designator D?)
D?170 "RB520ZS-30T2R" RB520ZS30T2R 885.83,-3070.47 r180 top (schematic designator D?)
D?171 "RB520ZS-30T2R" RB520ZS30T2R 590.55,-3070.47 r180 top (schematic designator D?)
D?172 "RB520ZS-30T2R" RB520ZS30T2R 295.28,-3070.47 r180 top (schematic designator D?)
D?173 "RB520ZS-30T2R" RB520ZS30T2R 295.28,-3369.69 r180 top (schematic designator D?)
D?174 "RB520ZS-30T2R" RB520ZS30T2R 590.55,-3369.69 r180 top (schematic designator D?)
D?175 "RB520ZS-30T2R" RB520ZS30T2R 885.83,-3369.69 r180 top (schematic designator D?)
D?176 "RB520ZS-30T2R" RB520ZS30T2R 1181.1,-3365.75 r180 top (schematic designator D?)
D?177 "RB520ZS-30T2R" RB520ZS30T2R 1476.38,-3369.69 r180 top (schematic designator D?)
D?178 "RB520ZS-30T2R" RB520ZS30T2R 1476.38,-3664.96 r180 top (schematic designator D?)
D?179 "RB520ZS-30T2R" RB520ZS30T2R 1476.38,-3953.15 r180 top (schematic designator D?)
D?180 "RB520ZS-30T2R" RB520ZS30T2R 1181.1,-3956.3 r180 top (schematic designator D?)
D?181 "RB520ZS-30T2R" RB520ZS30T2R 1181.1,-3661.81 r180 top (schematic designator D?)
D?182 "RB520ZS-30T2R" RB520ZS30T2R 885.83,-3664.96 r180 top (schematic designator D?)
D?183 "RB520ZS-30T2R" RB520ZS30T2R 295.28,-3661.02 r180 top (schematic designator D?)
D?184 "RB520ZS-30T2R" RB520ZS30T2R 590.55,-3661.02 r180 top (schematic designator D?)
D?185 "RB520ZS-30T2R" RB520ZS30T2R 295.28,-3956.3 r180 top (schematic designator D?)
D?186 "RB520ZS-30T2R" RB520ZS30T2R 590.55,-3956.3 r180 top (schematic designator D?)
D?187 "RB520ZS-30T2R" RB520ZS30T2R 885.83,-3956.3 r180 top (schematic designator D?)
D?188 "RB520ZS-30T2R" RB520ZS30T2R 295.28,-4255.51 r180 top (schematic designator D?)
D?189 "RB520ZS-30T2R" RB520ZS30T2R 590.55,-4255.51 r180 top (schematic designator D?)
D?190 "RB520ZS-30T2R" RB520ZS30T2R 885.83,-4255.51 r180 top (schematic designator D?)
D?191 "RB520ZS-30T2R" RB520ZS30T2R 1181.1,-4255.51 r180 top (schematic designator D?)
D?192 "RB520ZS-30T2R" RB520ZS30T2R 1145.28,-4547.24 r90 top (schematic designator D?)
D?193 "RB520ZS-30T2R" RB520ZS30T2R 885.83,-4551.18 r180 top (schematic designator D?)
D?194 "RB520ZS-30T2R" RB520ZS30T2R 590.55,-4550.79 r180 top (schematic designator D?)
D?195 "RB520ZS-30T2R" RB520ZS30T2R 295.28,-4547.24 r180 top (schematic designator D?)
D?196 "RB520ZS-30T2R" RB520ZS30T2R 0,-4546.85 r180 top (schematic designator D?)
D?197 "RB520ZS-30T2R" RB520ZS30T2R 0,-4838.98 r180 top (schematic designator D?)
D?198 "RB520ZS-30T2R" RB520ZS30T2R 295.28,-4846.06 r180 top (schematic designator D?)
D?199 "RB520ZS-30T2R" RB520ZS30T2R 590.55,-4846.06 r180 top (schematic designator D?)
D?200 "RB520ZS-30T2R" RB520ZS30T2R 885.83,-4846.06 r180 top (schematic designator D?)
D?201 "RB520ZS-30T2R" RB520ZS30T2R 295.28,-6027.17 r180 top (schematic designator D?)
D?202 "RB520ZS-30T2R" RB520ZS30T2R 590.55,-6023.23 r180 top (schematic designator D?)
D?203 "RB520ZS-30T2R" RB520ZS30T2R 885.83,-6027.17 r180 top (schematic designator D?)
D?204 "RB520ZS-30T2R" RB520ZS30T2R 0,-6318.5 r180 top (schematic designator D?)
D?205 "RB520ZS-30T2R" RB520ZS30T2R 295.28,-6318.5 r180 top (schematic designator D?)
D?206 "RB520ZS-30T2R" RB520ZS30T2R 590.55,-6318.5 r180 top (schematic designator D?)
D?207 "RB520ZS-30T2R" RB520ZS30T2R 885.83,-6318.5 r180 top (schematic designator D?)
D?208 "RB520ZS-30T2R" RB520ZS30T2R 885.83,-6613.78 r180 top (schematic designator D?)
D?209 "RB520ZS-30T2R" RB520ZS30T2R 590.55,-6613.78 r180 top (schematic designator D?)
D?210 "RB520ZS-30T2R" RB520ZS30T2R 294.74,-6614.04 r180 top (schematic designator D?)
D?211 "RB520ZS-30T2R" RB520ZS30T2R 0,-6613.78 r180 top (schematic designator D?)
D?212 "RB520ZS-30T2R" RB520ZS30T2R 295.28,-6909.06 r180 top (schematic designator D?)
D?213 "RB520ZS-30T2R" RB520ZS30T2R 590.55,-6912.99 r180 top (schematic designator D?)
D?214 "RB520ZS-30T2R" RB520ZS30T2R 885.83,-6916.93 r180 top (schematic designator D?)
D?215 "RB520ZS-30T2R" RB520ZS30T2R 295.28,-7208.27 r180 top (schematic designator D?)
D?216 "RB520ZS-30T2R" RB520ZS30T2R 295.28,-7503.54 r180 top (schematic designator D?)
D?217 "RB520ZS-30T2R" RB520ZS30T2R 295.28,-7794.88 r180 top (schematic designator D?)
D?218 "RB520ZS-30T2R" RB520ZS30T2R 295.28,-8094.09 r180 top (schematic designator D?)
D?219 "RB520ZS-30T2R" RB520ZS30T2R 511.42,-9523.62 r90 top (schematic designator D?)
D?220 "RB520ZS-30T2R" RB520ZS30T2R 885.83,-9562.6 r180 top (schematic designator D?)
D?221 "RB520ZS-30T2R" RB520ZS30T2R 1181.1,-9267.32 r180 top (schematic designator D?)
D?222 "RB520ZS-30T2R" RB520ZS30T2R 885.83,-9271.65 r180 top (schematic designator D?)
D?223 "RB520ZS-30T2R" RB520ZS30T2R 590.55,-9272.05 r180 top (schematic designator D?)
D?224 "RB520ZS-30T2R" RB520ZS30T2R 590.55,-8983.86 r180 top (schematic designator D?)
D?225 "RB520ZS-30T2R" RB520ZS30T2R 885.83,-8979.92 r180 top (schematic designator D?)
D?226 "RB520ZS-30T2R" RB520ZS30T2R 1181.1,-8975.98 r180 top (schematic designator D?)
D?227 "RB520ZS-30T2R" RB520ZS30T2R 1181.1,-8681.5 r180 top (schematic designator D?)
D?228 "RB520ZS-30T2R" RB520ZS30T2R 885.83,-8677.56 r180 top (schematic designator D?)
D?229 "RB520ZS-30T2R" RB520ZS30T2R 590.55,-8680.71 r180 top (schematic designator D?)
D?230 "RB520ZS-30T2R" RB520ZS30T2R 590.55,-8389.37 r180 top (schematic designator D?)
D?231 "RB520ZS-30T2R" RB520ZS30T2R 885.83,-8385.43 r180 top (schematic designator D?)
D?232 "RB520ZS-30T2R" RB520ZS30T2R 1181.1,-8397.24 r180 top (schematic designator D?)
D?233 "RB520ZS-30T2R" RB520ZS30T2R 1145.67,-8094.49 r180 top (schematic designator D?)
D?234 "RB520ZS-30T2R" RB520ZS30T2R 885.83,-8090.94 r180 top (schematic designator D?)
D?235 "RB520ZS-30T2R" RB520ZS30T2R 590.55,-8094.09 r180 top (schematic designator D?)
D?236 "RB520ZS-30T2R" RB520ZS30T2R 590.55,-7794.88 r180 top (schematic designator D?)
D?237 "RB520ZS-30T2R" RB520ZS30T2R 885.83,-7794.88 r180 top (schematic designator D?)
D?238 "RB520ZS-30T2R" RB520ZS30T2R 1181.1,-7790.94 r180 top (schematic designator D?)
D?239 "RB520ZS-30T2R" RB520ZS30T2R 1181.1,-7499.61 r180 top (schematic designator D?)
D?240 "RB520ZS-30T2R" RB520ZS30T2R 590.55,-7503.54 r180 top (schematic designator D?)
D?241 "RB520ZS-30T2R" RB520ZS30T2R 885.83,-7499.61 r180 top (schematic designator D?)
D?242 "RB520ZS-30T2R" RB520ZS30T2R 885.83,-7208.27 r180 top (schematic designator D?)
D?243 "RB520ZS-30T2R" RB520ZS30T2R 590.55,-7208.27 r180 top (schematic designator D?)
D?244 "RB520ZS-30T2R" RB520ZS30T2R 295.28,-5728.74 r180 top (schematic designator D?)
D?245 "RB520ZS-30T2R" RB520ZS30T2R 590.55,-5731.89 r180 top (schematic designator D?)
D?246 "RB520ZS-30T2R" RB520ZS30T2R 885.83,-5727.95 r180 top (schematic designator D?)
D?247 "RB520ZS-30T2R" RB520ZS30T2R 885.83,-5437.01 r180 top (schematic designator D?)
D?248 "RB520ZS-30T2R" RB520ZS30T2R 590.55,-5433.07 r180 top (schematic designator D?)
D?249 "RB520ZS-30T2R" RB520ZS30T2R 295.28,-5432.68 r180 top (schematic designator D?)
D?250 "RB520ZS-30T2R" RB520ZS30T2R 295.28,-5134.25 r180 top (schematic designator D?)
D?251 "RB520ZS-30T2R" RB520ZS30T2R 590.55,-5137.4 r180 top (schematic designator D?)
D?252 "RB520ZS-30T2R" RB520ZS30T2R 885.83,-5137.4 r180 top (schematic designator D?)
Designator18 "Comment" FPC0.5-WT-40P -6813.86,-7058.07 r270 top
E1 "Insole_electrode_v1" insole_electrode_v1#1 0,0 r0 top
E2 "Insole_electrode_v1" insole_electrode_v1#1 295.28,0 r0 top
E3 "Insole_electrode_v1" insole_electrode_v1#1 590.55,0 r0 top
E4 "Insole_electrode_v1" insole_electrode_v1#1 885.83,0 r0 top
E5 "Insole_electrode_v1" insole_electrode_v1#1 -295.28,-295.28 r0 top
E6 "Insole_electrode_v1" insole_electrode_v1#1 0,-295.28 r0 top
E7 "Insole_electrode_v1" insole_electrode_v1#1 295.28,-295.28 r0 top
E8 "Insole_electrode_v1" insole_electrode_v1#1 590.55,-295.28 r0 top
E9 "Insole_electrode_v1" insole_electrode_v1#1 885.83,-295.28 r0 top
E10 "Insole_electrode_v1" insole_electrode_v1#1 1181.1,-295.28 r0 top
E11 "Insole_electrode_v1" insole_electrode_v1#1 -295.28,-590.55 r0 top
E12 "Insole_electrode_v1" insole_electrode_v1#1 0,-590.55 r0 top
E13 "Insole_electrode_v1" insole_electrode_v1#1 295.28,-590.55 r0 top
E14 "Insole_electrode_v1" insole_electrode_v1#1 590.55,-590.55 r0 top
E15 "Insole_electrode_v1" insole_electrode_v1#1 885.83,-590.55 r0 top
E16 "Insole_electrode_v1" insole_electrode_v1#1 1181.1,-590.55 r0 top
E17 "Insole_electrode_v1" insole_electrode_v1#1 -590.55,-885.83 r0 top
E18 "Insole_electrode_v1" insole_electrode_v1#1 -295.28,-885.83 r0 top
E19 "Insole_electrode_v1" insole_electrode_v1#1 0,-885.83 r0 top
E20 "Insole_electrode_v1" insole_electrode_v1#1 295.28,-885.83 r0 top
E21 "Insole_electrode_v1" insole_electrode_v1#1 590.55,-885.83 r0 top
E22 "Insole_electrode_v1" insole_electrode_v1#1 885.83,-885.83 r0 top
E23 "Insole_electrode_v1" insole_electrode_v1#1 1181.1,-885.83 r0 top
E24 "Insole_electrode_v1" insole_electrode_v1#1 1476.38,-885.83 r0 top
E25 "Insole_electrode_v1" insole_electrode_v1#1 -590.55,-1181.1 r0 top
E26 "Insole_electrode_v1" insole_electrode_v1#1 -295.28,-1181.1 r0 top
E27 "Insole_electrode_v1" insole_electrode_v1#1 0,-1181.1 r0 top
E28 "Insole_electrode_v1" insole_electrode_v1#1 295.28,-1181.1 r0 top
E29 "Insole_electrode_v1" insole_electrode_v1#1 590.55,-1181.1 r0 top
E30 "Insole_electrode_v1" insole_electrode_v1#1 885.83,-1181.1 r0 top
E31 "Insole_electrode_v1" insole_electrode_v1#1 1181.1,-1181.1 r0 top
E32 "Insole_electrode_v1" insole_electrode_v1#1 1476.38,-1181.1 r0 top
E33 "Insole_electrode_v1" insole_electrode_v1#1 -885.83,-1476.38 r0 top
E34 "Insole_electrode_v1" insole_electrode_v1#1 -590.55,-1476.38 r0 top
E35 "Insole_electrode_v1" insole_electrode_v1#1 -295.28,-1476.38 r0 top
E36 "Insole_electrode_v1" insole_electrode_v1#1 0,-1476.38 r0 top
E37 "Insole_electrode_v1" insole_electrode_v1#1 295.28,-1476.38 r0 top
E38 "Insole_electrode_v1" insole_electrode_v1#1 590.55,-1476.38 r0 top
E39 "Insole_electrode_v1" insole_electrode_v1#1 885.83,-1476.38 r0 top
E40 "Insole_electrode_v1" insole_electrode_v1#1 1181.1,-1476.38 r0 top
E41 "Insole_electrode_v1" insole_electrode_v1#1 1476.38,-1476.38 r0 top
E42 "Insole_electrode_v1" insole_electrode_v1#1 -885.83,-1771.65 r0 top
E43 "Insole_electrode_v1" insole_electrode_v1#1 -590.55,-1771.65 r0 top
E44 "Insole_electrode_v1" insole_electrode_v1#1 -295.28,-1771.65 r0 top
E45 "Insole_electrode_v1" insole_electrode_v1#1 0,-1771.65 r0 top
E46 "Insole_electrode_v1" insole_electrode_v1#1 295.28,-1771.65 r0 top
E47 "Insole_electrode_v1" insole_electrode_v1#1 590.55,-1771.65 r0 top
E48 "Insole_electrode_v1" insole_electrode_v1#1 885.83,-1771.65 r0 top
E49 "Insole_electrode_v1" insole_electrode_v1#1 1181.1,-1771.65 r0 top
E50 "Insole_electrode_v1" insole_electrode_v1#1 1476.38,-1771.65 r0 top
E51 "Insole_electrode_v1" insole_electrode_v1#1 -885.83,-2066.93 r0 top
E52 "Insole_electrode_v1" insole_electrode_v1#1 -590.55,-2066.93 r0 top
E53 "Insole_electrode_v1" insole_electrode_v1#1 -295.28,-2066.93 r0 top
E54 "Insole_electrode_v1" insole_electrode_v1#1 0,-2066.93 r0 top
E55 "Insole_electrode_v1" insole_electrode_v1#1 295.28,-2066.93 r0 top
E56 "Insole_electrode_v1" insole_electrode_v1#1 590.55,-2066.93 r0 top
E57 "Insole_electrode_v1" insole_electrode_v1#1 885.83,-2066.93 r0 top
E58 "Insole_electrode_v1" insole_electrode_v1#1 1181.1,-2066.93 r0 top
E59 "Insole_electrode_v1" insole_electrode_v1#1 1476.38,-2066.93 r0 top
E60 "Insole_electrode_v1" insole_electrode_v1#1 -1181.1,-2362.2 r0 top
E61 "Insole_electrode_v1" insole_electrode_v1#1 -885.83,-2362.2 r0 top
E62 "Insole_electrode_v1" insole_electrode_v1#1 -590.55,-2362.2 r0 top
E63 "Insole_electrode_v1" insole_electrode_v1#1 -295.28,-2362.2 r0 top
E64 "Insole_electrode_v1" insole_electrode_v1#1 0,-2362.2 r0 top
E65 "Insole_electrode_v1" insole_electrode_v1#1 295.28,-2362.2 r0 top
E66 "Insole_electrode_v1" insole_electrode_v1#1 590.55,-2362.2 r0 top
E67 "Insole_electrode_v1" insole_electrode_v1#1 885.83,-2362.2 r0 top
E68 "Insole_electrode_v1" insole_electrode_v1#1 1181.1,-2362.2 r0 top
E69 "Insole_electrode_v1" insole_electrode_v1#1 1476.38,-2362.2 r0 top
E70 "Insole_electrode_v1" insole_electrode_v1#1 1771.65,-2362.2 r0 top
E71 "Insole_electrode_v1" insole_electrode_v1#1 -1181.1,-2657.48 r0 top
E72 "Insole_electrode_v1" insole_electrode_v1#1 -885.83,-2657.48 r0 top
E73 "Insole_electrode_v1" insole_electrode_v1#1 -590.55,-2657.48 r0 top
E74 "Insole_electrode_v1" insole_electrode_v1#1 -295.28,-2657.48 r0 top
E75 "Insole_electrode_v1" insole_electrode_v1#1 0,-2657.48 r0 top
E76 "Insole_electrode_v1" insole_electrode_v1#1 295.28,-2657.48 r0 top
E77 "Insole_electrode_v1" insole_electrode_v1#1 590.55,-2657.48 r0 top
E78 "Insole_electrode_v1" insole_electrode_v1#1 885.83,-2657.48 r0 top
E79 "Insole_electrode_v1" insole_electrode_v1#1 1181.1,-2657.48 r0 top
E80 "Insole_electrode_v1" insole_electrode_v1#1 1476.38,-2657.48 r0 top
E81 "Insole_electrode_v1" insole_electrode_v1#1 1771.65,-2657.48 r0 top
E82 "Insole_electrode_v1" insole_electrode_v1#1 -1181.1,-2952.76 r0 top
E83 "Insole_electrode_v1" insole_electrode_v1#1 -885.83,-2952.76 r0 top
E84 "Insole_electrode_v1" insole_electrode_v1#1 -590.55,-2952.76 r0 top
E85 "Insole_electrode_v1" insole_electrode_v1#1 -295.28,-2952.76 r0 top
E86 "Insole_electrode_v1" insole_electrode_v1#1 0,-2952.76 r0 top
E87 "Insole_electrode_v1" insole_electrode_v1#1 295.28,-2952.76 r0 top
E88 "Insole_electrode_v1" insole_electrode_v1#1 590.55,-2952.76 r0 top
E89 "Insole_electrode_v1" insole_electrode_v1#1 885.83,-2952.76 r0 top
E90 "Insole_electrode_v1" insole_electrode_v1#1 1181.1,-2952.76 r0 top
E91 "Insole_electrode_v1" insole_electrode_v1#1 1476.38,-2952.76 r0 top
E92 "Insole_electrode_v1" insole_electrode_v1#1 -1181.1,-3248.03 r0 top
E93 "Insole_electrode_v1" insole_electrode_v1#1 -885.83,-3248.03 r0 top
E94 "Insole_electrode_v1" insole_electrode_v1#1 -590.55,-3248.03 r0 top
E95 "Insole_electrode_v1" insole_electrode_v1#1 -295.28,-3248.03 r0 top
E96 "Insole_electrode_v1" insole_electrode_v1#1 0,-3248.03 r0 top
E97 "Insole_electrode_v1" insole_electrode_v1#1 295.28,-3248.03 r0 top
E98 "Insole_electrode_v1" insole_electrode_v1#1 590.55,-3248.03 r0 top
E99 "Insole_electrode_v1" insole_electrode_v1#1 885.83,-3248.03 r0 top
E100 "Insole_electrode_v1" insole_electrode_v1#1 1181.1,-3248.03 r0 top
E101 "Insole_electrode_v1" insole_electrode_v1#1 1476.38,-3248.03 r0 top
E102 "Insole_electrode_v1" insole_electrode_v1#1 -1181.1,-3543.31 r0 top
E103 "Insole_electrode_v1" insole_electrode_v1#1 -885.83,-3543.31 r0 top
E104 "Insole_electrode_v1" insole_electrode_v1#1 -590.55,-3543.31 r0 top
E105 "Insole_electrode_v1" insole_electrode_v1#1 -295.28,-3543.31 r0 top
E106 "Insole_electrode_v1" insole_electrode_v1#1 0,-3543.31 r0 top
E107 "Insole_electrode_v1" insole_electrode_v1#1 295.28,-3543.31 r0 top
E108 "Insole_electrode_v1" insole_electrode_v1#1 590.55,-3543.31 r0 top
E109 "Insole_electrode_v1" insole_electrode_v1#1 885.83,-3543.31 r0 top
E110 "Insole_electrode_v1" insole_electrode_v1#1 1181.1,-3543.31 r0 top
E111 "Insole_electrode_v1" insole_electrode_v1#1 1476.38,-3543.31 r0 top
E112 "Insole_electrode_v1" insole_electrode_v1#1 -1181.1,-3838.58 r0 top
E113 "Insole_electrode_v1" insole_electrode_v1#1 -885.83,-3838.58 r0 top
E114 "Insole_electrode_v1" insole_electrode_v1#1 -590.55,-3838.58 r0 top
E115 "Insole_electrode_v1" insole_electrode_v1#1 -295.28,-3838.58 r0 top
E116 "Insole_electrode_v1" insole_electrode_v1#1 0,-3838.58 r0 top
E117 "Insole_electrode_v1" insole_electrode_v1#1 295.28,-3838.58 r0 top
E118 "Insole_electrode_v1" insole_electrode_v1#1 590.55,-3838.58 r0 top
E119 "Insole_electrode_v1" insole_electrode_v1#1 885.83,-3838.58 r0 top
E120 "Insole_electrode_v1" insole_electrode_v1#1 1181.1,-3838.58 r0 top
E121 "Insole_electrode_v1" insole_electrode_v1#1 1476.38,-3838.58 r0 top
E122 "Insole_electrode_v1" insole_electrode_v1#1 -1181.1,-4133.86 r0 top
E123 "Insole_electrode_v1" insole_electrode_v1#1 -885.83,-4133.86 r0 top
E124 "Insole_electrode_v1" insole_electrode_v1#1 -590.55,-4133.86 r0 top
E125 "Insole_electrode_v1" insole_electrode_v1#1 -295.28,-4133.86 r0 top
E126 "Insole_electrode_v1" insole_electrode_v1#1 0,-4133.86 r0 top
E127 "Insole_electrode_v1" insole_electrode_v1#1 295.28,-4133.86 r0 top
E128 "Insole_electrode_v1" insole_electrode_v1#1 590.55,-4133.86 r0 top
E129 "Insole_electrode_v1" insole_electrode_v1#1 885.83,-4133.86 r0 top
E130 "Insole_electrode_v1" insole_electrode_v1#1 1181.1,-4133.86 r0 top
E131 "Insole_electrode_v1" insole_electrode_v1#1 -1181.1,-4429.13 r0 top
E132 "Insole_electrode_v1" insole_electrode_v1#1 -885.83,-4429.13 r0 top
E133 "Insole_electrode_v1" insole_electrode_v1#1 -590.55,-4429.13 r0 top
E134 "Insole_electrode_v1" insole_electrode_v1#1 -295.28,-4429.13 r0 top
E135 "Insole_electrode_v1" insole_electrode_v1#1 0,-4429.13 r0 top
E136 "Insole_electrode_v1" insole_electrode_v1#1 295.28,-4429.13 r0 top
E137 "Insole_electrode_v1" insole_electrode_v1#1 590.55,-4429.13 r0 top
E138 "Insole_electrode_v1" insole_electrode_v1#1 885.83,-4429.13 r0 top
E139 "Insole_electrode_v1" insole_electrode_v1#1 1181.1,-4429.13 r0 top
E140 "Insole_electrode_v1" insole_electrode_v1#1 -1181.1,-4724.41 r0 top
E141 "Insole_electrode_v1" insole_electrode_v1#1 -885.83,-4724.41 r0 top
E142 "Insole_electrode_v1" insole_electrode_v1#1 -590.55,-4724.41 r0 top
E143 "Insole_electrode_v1" insole_electrode_v1#1 -295.28,-4724.41 r0 top
E144 "Insole_electrode_v1" insole_electrode_v1#1 0,-4724.41 r0 top
E145 "Insole_electrode_v1" insole_electrode_v1#1 295.28,-4724.41 r0 top
E146 "Insole_electrode_v1" insole_electrode_v1#1 590.55,-4724.41 r0 top
E147 "Insole_electrode_v1" insole_electrode_v1#1 885.83,-4724.41 r0 top
E148 "Insole_electrode_v1" insole_electrode_v1#1 -885.83,-5019.69 r0 top
E149 "Insole_electrode_v1" insole_electrode_v1#1 -590.55,-5019.69 r0 top
E150 "Insole_electrode_v1" insole_electrode_v1#1 -295.28,-5019.69 r0 top
E151 "Insole_electrode_v1" insole_electrode_v1#1 0,-5019.69 r0 top
E152 "Insole_electrode_v1" insole_electrode_v1#1 295.28,-5019.69 r0 top
E153 "Insole_electrode_v1" insole_electrode_v1#1 590.55,-5019.69 r0 top
E154 "Insole_electrode_v1" insole_electrode_v1#1 885.83,-5019.69 r0 top
E155 "Insole_electrode_v1" insole_electrode_v1#1 -885.83,-5314.96 r0 top
E156 "Insole_electrode_v1" insole_electrode_v1#1 -590.55,-5314.96 r0 top
E157 "Insole_electrode_v1" insole_electrode_v1#1 -295.28,-5314.96 r0 top
E158 "Insole_electrode_v1" insole_electrode_v1#1 0,-5314.96 r0 top
E159 "Insole_electrode_v1" insole_electrode_v1#1 295.28,-5314.96 r0 top
E160 "Insole_electrode_v1" insole_electrode_v1#1 590.55,-5314.96 r0 top
E161 "Insole_electrode_v1" insole_electrode_v1#1 885.83,-5314.96 r0 top
E162 "Insole_electrode_v1" insole_electrode_v1#1 -885.83,-5610.24 r0 top
E163 "Insole_electrode_v1" insole_electrode_v1#1 -590.55,-5610.24 r0 top
E164 "Insole_electrode_v1" insole_electrode_v1#1 -295.28,-5610.24 r0 top
E165 "Insole_electrode_v1" insole_electrode_v1#1 0,-5610.24 r0 top
E166 "Insole_electrode_v1" insole_electrode_v1#1 295.28,-5610.24 r0 top
E167 "Insole_electrode_v1" insole_electrode_v1#1 590.55,-5610.24 r0 top
E168 "Insole_electrode_v1" insole_electrode_v1#1 885.83,-5610.24 r0 top
E169 "Insole_electrode_v1" insole_electrode_v1#1 -590.55,-5905.51 r0 top (schematic designator E170)
E170 "Insole_electrode_v1" insole_electrode_v1#1 -295.28,-5905.51 r0 top (schematic designator E171)
E171 "Insole_electrode_v1" insole_electrode_v1#1 0,-5905.51 r0 top (schematic designator E172)
E172 "Insole_electrode_v1" insole_electrode_v1#1 295.28,-5905.51 r0 top (schematic designator E173)
E173 "Insole_electrode_v1" insole_electrode_v1#1 590.55,-5905.51 r0 top (schematic designator E174)
E174 "Insole_electrode_v1" insole_electrode_v1#1 885.83,-5905.51 r0 top (schematic designator E175)
E175 "Insole_electrode_v1" insole_electrode_v1#1 -590.55,-6200.79 r0 top (schematic designator E176)
E176 "Insole_electrode_v1" insole_electrode_v1#1 -295.28,-6200.79 r0 top (schematic designator E177)
E177 "Insole_electrode_v1" insole_electrode_v1#1 0,-6200.79 r0 top (schematic designator E178)
E178 "Insole_electrode_v1" insole_electrode_v1#1 295.28,-6200.79 r0 top (schematic designator E179)
E179 "Insole_electrode_v1" insole_electrode_v1#1 590.55,-6200.79 r0 top (schematic designator E180)
E180 "Insole_electrode_v1" insole_electrode_v1#1 885.83,-6200.79 r0 top (schematic designator E181)
E181 "Insole_electrode_v1" insole_electrode_v1#2 -590.55,-6496.06 r0 top (schematic designator E182)
E182 "Insole_electrode_v1" insole_electrode_v1#1 -295.28,-6496.06 r0 top (schematic designator E183)
E183 "Insole_electrode_v1" insole_electrode_v1#1 0,-6496.06 r0 top (schematic designator E184)
E184 "Insole_electrode_v1" insole_electrode_v1#1 295.28,-6496.06 r0 top (schematic designator E185)
E185 "Insole_electrode_v1" insole_electrode_v1#1 590.55,-6496.06 r0 top (schematic designator E186)
E186 "Insole_electrode_v1" insole_electrode_v1#1 885.83,-6496.06 r0 top (schematic designator E187)
E187 "Insole_electrode_v1" insole_electrode_v1#1 -590.55,-6791.34 r0 top (schematic designator E189)
E188 "Insole_electrode_v1" insole_electrode_v1#1 -295.28,-6791.34 r0 top (schematic designator E190)
E189 "Insole_electrode_v1" insole_electrode_v1#1 0,-6791.34 r0 top (schematic designator E191)
E190 "Insole_electrode_v1" insole_electrode_v1#1 295.28,-6791.34 r0 top (schematic designator E192)
E191 "Insole_electrode_v1" insole_electrode_v1#1 590.55,-6791.34 r0 top (schematic designator E193)
E192 "Insole_electrode_v1" insole_electrode_v1#1 885.83,-6791.34 r0 top (schematic designator E194)
E193 "Insole_electrode_v1" insole_electrode_v1#1 -885.83,-7086.61 r0 top (schematic designator E195)
E194 "Insole_electrode_v1" insole_electrode_v1#1 -590.55,-7086.61 r0 top (schematic designator E196)
E195 "Insole_electrode_v1" insole_electrode_v1#1 -295.28,-7086.61 r0 top (schematic designator E197)
E196 "Insole_electrode_v1" insole_electrode_v1#1 0,-7086.61 r0 top (schematic designator E198)
E197 "Insole_electrode_v1" insole_electrode_v1#1 295.28,-7086.61 r0 top (schematic designator E199)
E198 "Insole_electrode_v1" insole_electrode_v1#1 590.55,-7086.61 r0 top (schematic designator E200)
E199 "Insole_electrode_v1" insole_electrode_v1#1 885.83,-7086.61 r0 top (schematic designator E201)
E200 "Insole_electrode_v1" insole_electrode_v1#2 -885.83,-7381.89 r0 top (schematic designator E202)
E201 "Insole_electrode_v1" insole_electrode_v1#1 -590.55,-7381.89 r0 top (schematic designator E203)
E202 "Insole_electrode_v1" insole_electrode_v1#1 -295.28,-7381.89 r0 top (schematic designator E204)
E203 "Insole_electrode_v1" insole_electrode_v1#1 0,-7381.89 r0 top (schematic designator E205)
E204 "Insole_electrode_v1" insole_electrode_v1#1 295.28,-7381.89 r0 top (schematic designator E206)
E205 "Insole_electrode_v1" insole_electrode_v1#1 590.55,-7381.89 r0 top (schematic designator E207)
E206 "Insole_electrode_v1" insole_electrode_v1#1 885.83,-7381.89 r0 top (schematic designator E208)
E207 "Insole_electrode_v1" insole_electrode_v1#1 1181.1,-7381.89 r0 top (schematic designator E209)
E208 "Insole_electrode_v1" insole_electrode_v1#1 -590.55,-7677.17 r0 top (schematic designator E210)
E209 "Insole_electrode_v1" insole_electrode_v1#1 -295.28,-7677.17 r0 top (schematic designator E211)
E210 "Insole_electrode_v1" insole_electrode_v1#1 0,-7677.17 r0 top (schematic designator E212)
E211 "Insole_electrode_v1" insole_electrode_v1#1 295.28,-7677.17 r0 top (schematic designator E213)
E212 "Insole_electrode_v1" insole_electrode_v1#1 590.55,-7677.17 r0 top (schematic designator E214)
E213 "Insole_electrode_v1" insole_electrode_v1#1 885.83,-7677.17 r0 top (schematic designator E215)
E214 "Insole_electrode_v1" insole_electrode_v1#1 1181.1,-7677.17 r0 top (schematic designator E216)
E215 "Insole_electrode_v1" insole_electrode_v1#1 -590.55,-7972.44 r0 top (schematic designator E217)
E216 "Insole_electrode_v1" insole_electrode_v1#1 -295.28,-7972.44 r0 top (schematic designator E218)
E217 "Insole_electrode_v1" insole_electrode_v1#1 0,-7972.44 r0 top (schematic designator E219)
E218 "Insole_electrode_v1" insole_electrode_v1#1 295.28,-7972.44 r0 top (schematic designator E220)
E219 "Insole_electrode_v1" insole_electrode_v1#1 590.55,-7972.44 r0 top (schematic designator E221)
E220 "Insole_electrode_v1" insole_electrode_v1#1 885.83,-7972.44 r0 top (schematic designator E222)
E221 "Insole_electrode_v1" insole_electrode_v1#1 1181.1,-7972.44 r0 top (schematic designator E223)
E222 "Insole_electrode_v1" insole_electrode_v1#1 -590.55,-8267.72 r0 top (schematic designator E224)
E223 "Insole_electrode_v1" insole_electrode_v1#1 -295.28,-8267.72 r0 top (schematic designator E225)
E224 "Insole_electrode_v1" insole_electrode_v1#1 0,-8267.72 r0 top (schematic designator E226)
E225 "Insole_electrode_v1" insole_electrode_v1#1 295.28,-8267.72 r0 top (schematic designator E227)
E226 "Insole_electrode_v1" insole_electrode_v1#1 590.55,-8267.72 r0 top (schematic designator E228)
E227 "Insole_electrode_v1" insole_electrode_v1#1 885.83,-8267.72 r0 top (schematic designator E229)
E228 "Insole_electrode_v1" insole_electrode_v1#1 1181.1,-8267.72 r0 top (schematic designator E230)
E229 "Insole_electrode_v1" insole_electrode_v1#1 -590.55,-8562.99 r0 top (schematic designator E231)
E230 "Insole_electrode_v1" insole_electrode_v1#1 -295.28,-8562.99 r0 top (schematic designator E232)
E231 "Insole_electrode_v1" insole_electrode_v1#1 0,-8562.99 r0 top (schematic designator E233)
E232 "Insole_electrode_v1" insole_electrode_v1#1 295.28,-8562.99 r0 top (schematic designator E234)
E233 "Insole_electrode_v1" insole_electrode_v1#1 590.55,-8562.99 r0 top (schematic designator E235)
E234 "Insole_electrode_v1" insole_electrode_v1#1 885.83,-8562.99 r0 top (schematic designator E236)
E235 "Insole_electrode_v1" insole_electrode_v1#1 1181.1,-8562.99 r0 top (schematic designator E237)
E236 "Insole_electrode_v1" insole_electrode_v1#1 -590.55,-8858.27 r0 top (schematic designator E238)
E237 "Insole_electrode_v1" insole_electrode_v1#1 -295.28,-8858.27 r0 top (schematic designator E239)
E238 "Insole_electrode_v1" insole_electrode_v1#1 0,-8858.27 r0 top (schematic designator E240)
E239 "Insole_electrode_v1" insole_electrode_v1#1 295.28,-8858.27 r0 top (schematic designator E241)
E240 "Insole_electrode_v1" insole_electrode_v1#1 590.55,-8858.27 r0 top (schematic designator E242)
E241 "Insole_electrode_v1" insole_electrode_v1#1 885.83,-8858.27 r0 top (schematic designator E243)
E242 "Insole_electrode_v1" insole_electrode_v1#1 1181.1,-8858.27 r0 top (schematic designator E244)
E243 "Insole_electrode_v1" insole_electrode_v1#1 -295.28,-9153.54 r0 top (schematic designator E246)
E244 "Insole_electrode_v1" insole_electrode_v1#1 0,-9153.54 r0 top (schematic designator E247)
E245 "Insole_electrode_v1" insole_electrode_v1#1 295.28,-9153.54 r0 top (schematic designator E248)
E246 "Insole_electrode_v1" insole_electrode_v1#1 590.55,-9153.54 r0 top (schematic designator E249)
E247 "Insole_electrode_v1" insole_electrode_v1#1 885.83,-9153.54 r0 top (schematic designator E250)
E248 "Insole_electrode_v1" insole_electrode_v1#1 1181.1,-9153.54 r0 top (schematic designator E251)
E249 "Insole_electrode_v1" insole_electrode_v1#1 -295.28,-9448.82 r0 top (schematic designator E252)
E250 "Insole_electrode_v1" insole_electrode_v1#1 0,-9448.82 r0 top (schematic designator E253)
E251 "Insole_electrode_v1" insole_electrode_v1#1 295.28,-9448.82 r0 top
E252 "Insole_electrode_v1" insole_electrode_v1#1 590.55,-9448.82 r0 top
E253 "Insole_electrode_v1" insole_electrode_v1#1 885.83,-9448.82 r0 top

## Footprints (in the part's own frame and the unit in brackets; to place one, negate y for a bottom-side part, rotate by r counter-clockwise, add the part's x,y. Pads: shape width x height; smd on the part's side, far side on the other; paste and mask are expansions set on the pad)
FPC0.5-WT-40P [mm] "长：24.2mm，宽：5.2mm，高：2mm               黄晶宝石"
  rect 0.3x1.3 smd far side mask+0.102: 1(-9.75,2.497) 2(-9.25,2.497) 3(-8.75,2.497) 4(-8.25,2.497) 5(-7.75,2.497) 6(-7.25,2.497) 7(-6.75,2.497) 8(-6.25,2.497) 9(-5.75,2.497) 10(-5.25,2.497) 11(-4.75,2.497) 12(-4.25,2.497) 13(-3.75,2.497) 14(-3.25,2.497) 15(-2.75,2.497) 16(-2.25,2.497) 17(-1.75,2.497) 18(-1.25,2.497) 19(-0.75,2.497) 20(-0.25,2.497) 21(0.25,2.497) 22(0.75,2.497) 23(1.25,2.497) 24(1.75,2.497) 25(2.25,2.497) 26(2.75,2.497) 27(3.25,2.497) 28(3.75,2.497) 29(4.25,2.497) 30(4.75,2.497) 31(5.25,2.497) 32(5.75,2.497) 33(6.25,2.497) 34(6.75,2.497) 35(7.25,2.497) 36(7.75,2.497) 37(8.25,2.497) 38(8.75,2.497) 39(9.25,2.497) 40(9.75,2.497) 41(10.25,2.497) 42(10.75,2.497) 43(11.25,2.497) 44(11.75,2.497) 45(12.25,2.497) 46(12.75,2.497) 47(13.25,2.497) 48(13.75,2.497) 49(14.25,2.497) 50(14.75,2.497) 51(15.25,2.497) 52(15.75,2.497) 53(16.25,2.497) 54(16.75,2.497) 55(17.25,2.497) 56(17.75,2.497) 57(18.25,2.497) 58(18.75,2.497) 59(19.25,2.497) 60(19.75,2.497) 61(20.25,2.497) 62(20.75,2.497) 63(21.25,2.497) 64(21.75,2.497)
  silkscreen extent -10.77,2.87 -10.41,3.23
insole_electrode_v1#1 [mm]
  round 1 hole 0.25 mask+0.102: 0(0,0)
  round 0.5 hole 0.25 mask+0.102: 1(0,-1.524) 1(0,1.524)
  Top Layer circle w0.5: c0,0 r1.54
insole_electrode_v1#2 [mm]
  round 1 hole 0.25 mask+0.102: 0(0,0)
  round 0.5 hole 0.25 paste+0 mask+0.102: 1(0,-1.524)
  round 0.5 hole 0.25 mask+0.102: 1(0,1.524)
  Top Layer circle w0.5: c0,0 r1.54
RB520ZS30T2R [mm]
  rect 0.31x0.23 smd far side mask+0.102: 1(0,0.19) 2(0,-0.19)
  silkscreen extent -0.15,0.8 -0.05,0.9